# Altium PCB PCB1_test.PcbDoc
Units mm, origin at the board's own origin, x right, y up, seen from the top; angles counter-clockwise.
Board outline 17.02 x 11.05 mm, 2 copper layers (Top Layer, Bottom Layer); 8 components, 8 nets, 55 pads, 9 vias.
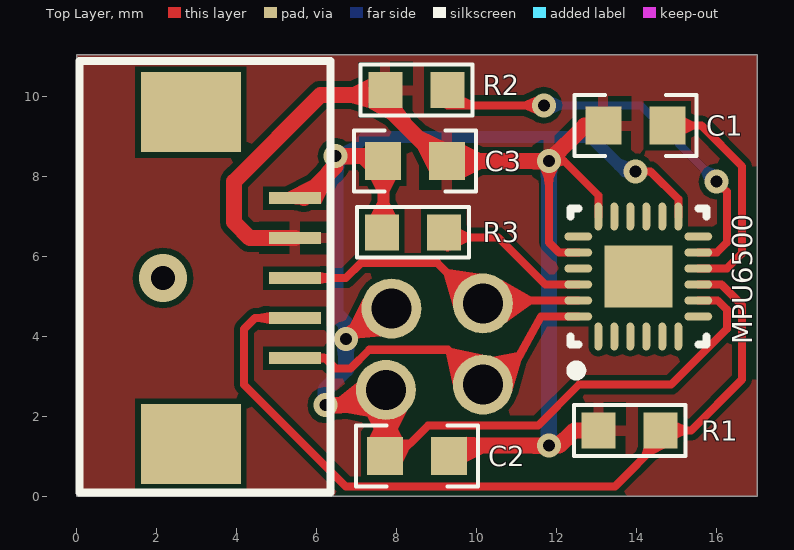
[diagram p0: Top Layer view]
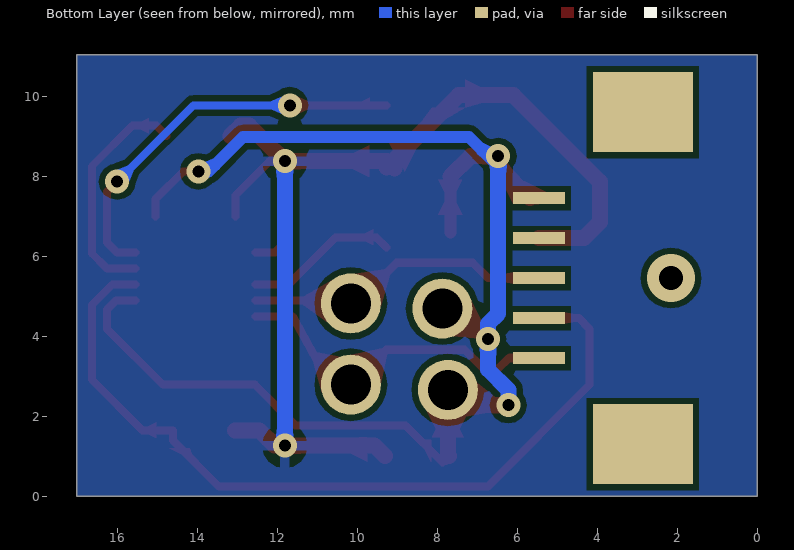
[diagram p1: Bottom Layer view, seen from below]

## Layer stack, top to bottom
Top Solder: solder mask 0.0102, Solder Resist, Dk 3.5
Top Layer: signal copper 0.0356
Dielectric 1: dielectric 0.32, FR-4, Dk 4.8
Bottom Layer: signal copper 0.0356
Bottom Solder: solder mask 0.0102, Solder Resist, Dk 3.5

## Board outline
0,0 0,11.049 17.018,11.049 17.018,0

## Design rules (kind name [scope] priority, off if disabled: settings)
Clearance [All] p1: gap=0.15 ignorepadtopadclearanceinfootprint=TRUE except(0: Arc-Hole Track-Hole SMDPad-Hole THPad-Hole Via-Hole Fill-Hole Poly-Hole Region-Hole Text-Hole)
MinimumSolderMaskSliver [All] p1: minsoldermaskwidth=0.15
PolygonConnect [All] p1: connectstyle=Relief reliefconductorwidth=0.254 reliefentries=4 polygonreliefangle="90 Angle" airgapwidth=0.254
RoutingVias [All] p1: holewidth=0.3 width=0.6 viastyle="Through Hole" minholewidth=0.3 minwidth=0.5 maxholewidth=0.711 maxwidth=1.27
SilkToSolderMaskClearance [IsPad] p1: minsilkscreentomaskgap=0.2 clearancetoexposedcopper=TRUE
SolderMaskExpansion [All] p1: expansion=0.102
Width [All] p1: maxlimit=2.032 minlimit=0.2 preferedwidth=0.2
28 further rules are at their usual default settings.

## Components (designator, comment, footprint, x,y, rotation, side; value= is the part's Value field where it differs from the comment)
* "FPCPin" ? 5.461,7.461 r270 top locked
C1 "C0603" CAPC1608X09N 13.97,9.271 r0 top value=0.1uF
C2 "C0603" CAPC1608X09N 8.509,1.016 r180 top value=10nF
C3 "C0603" CAPC1608X09N 8.459,8.382 r0 top value=0.1uF
MPU6500 "MPU6500" QFN40P300X300X90_HS-25N 14.043,5.5 r90 top locked (schematic designator U1)
R1 "R0603" RESC1608X09N 13.83,1.651 r180 top value=4.7K
R2 "R0603" RESC1608X09N 8.496,10.16 r180 top value=4.7K
R3 "R0603" RESC1608X09N 8.409,6.604 r0 top value=4.7K

## Footprints (in the part's own frame and the unit in brackets; to place one, negate y for a bottom-side part, rotate by r counter-clockwise, add the part's x,y. Pads: shape width x height; smd on the part's side, far side on the other; paste and mask are expansions set on the pad)
CAPC1608X09N [mm] "Chip Capacitor, 2-Leads, Body 1.60x0.80mm, IPC Medium Density"
  rect 0.9x0.95 smd: 1(-0.8,0) 2(0.8,0)
  silkscreen extent -1.52,-0.76 1.52,0.76, body extent -0.85,-0.45 0.85,0.45, height 0.9
QFN40P300X300X90_HS-25N [mm] "QFN, 24-Leads, Body 3.00x3.00mm, Pitch 0.40mm, Thermal Pad 1.54x1.70mm, IPC Medium Density"
  oval 0.7x0.2 smd mask+0: 1(-1.5,1) 2(-1.5,0.6) 3(-1.5,0.2) 4(-1.5,-0.2) 5(-1.5,-0.6) 6(-1.5,-1) 13(1.5,-1) 14(1.5,-0.6) 15(1.5,-0.2) 16(1.5,0.2) 17(1.5,0.6) 18(1.5,1)
  oval 0.2x0.7 smd mask+0: 7(-1,-1.5) 8(-0.6,-1.5) 9(-0.2,-1.5) 10(0.2,-1.5) 11(0.6,-1.5) 12(1,-1.5) 19(1,1.5) 20(0.6,1.5) 21(0.2,1.5) 22(-0.2,1.5) 23(-0.6,1.5) 24(-1,1.5)
  rect 1.54x1.7 smd mask+0: 25(0,0)
  silkscreen extent -2.47,-1.7 1.7,1.7, body extent -1.55,-1.55 1.55,1.55, height 0.9
RESC1608X09N [mm] "Chip Resistor, 2-Leads, Body 1.60x0.80mm, IPC Medium Density"
  rect 0.85x0.9 smd: 1(-0.775,0) 2(0.775,0)
  silkscreen extent -1.4,-0.64 1.4,0.64, body extent -0.85,-0.45 0.85,0.45, height 0.9
? [mm]
  rect 2x2.5 smd: A1(-2.15,-2.6) A1(6.15,-2.6)
  rect 0.3x1.3 smd: AD0(3,0) GND(1,0) SCL(2,0) SDA(4,0) VCC(0,0)
  rect 2x2.5 smd far side: B1(-2.15,-2.6) B1(6.15,-2.6)
  rect 0.3x1.3 smd far side: B1(0,0) B2(1,0) B3(2,0) B4(3,0) B5(4,0)
  silkscreen extent -3.43,-5.39 7.37,0.89

## Part data
MPU6500: library part Component_1

## Free pads (board coordinates)
  round 1.5 hole 1: 1(7.874,4.699) 2(10.16,4.826) 3(7.734,2.667) 4(10.16,2.794)

## Via types
v1: diameter 0.6, hole 0.3, Top Layer to Bottom Layer, 8 vias
v2: diameter 1.2, hole 0.6, Top Layer to Bottom Layer, 1 vias

## Nets (pads, with @x,y where several pads share a name; then routed paths per layer and width w, separated by ;. In a path a pad name is that pad's centre, name@x,y a point inside that pad or via, vN(x,y) a via of type N, cw(c..) or ccw(c..) an arc to the next point about the centre after c; other vN are vias at no path point)
AD0: *.AD0 MPU6500.9 R1.1 | length 20.7
  Top Layer w0.2: R1.1 15.367,1.651 16.637,2.921 16.637,4.787 16.124,5.3 MPU6500.9
  Top Layer w0.203: *.AD0 4.461,4.461 4.191,4.191 4.191,2.794 6.731,0.254 13.462,0.254 14.605,1.397 R1.1
GND: *.GND C1.1 C2.1 C3.2 MPU6500.18 MPU6500.20 R1.2 R2.2 | length 30.4
  Top Layer w0.2: MPU6500.20 12.061,6.1 11.811,6.35 v1(11.811,8.382) 12.192,8.382 13.043,7.531 MPU6500.18
  Top Layer w0.4: *.GND 4.334,6.461 3.937,6.858 3.937,7.874 6.096,10.033 7.467,10.033 C3.2@9.188,8.312 ; C3.2@9.074,8.198 C3.2@9.188,8.312 ; C3.2@9.271,8.229 C3.2@9.188,8.312 ; C2.1 9.563,1.27 v1(11.811,1.27) 12.065,1.27 12.446,1.651 R1.2 ; C1.1@13.17,9.017 12.916,9.271 12.7,9.271 v1(11.811,8.382) C3.2 C3.2@9.188,8.312
  Bottom Layer w0.4: v1(11.811,1.27) v1(11.811,8.382)
NetC1_2: C1.2 MPU6500.10 | length 5.8
  Top Layer w0.2: C1.2@14.77,9.017 15.024,9.271 15.621,9.271 16.637,8.255 16.637,6.081 16.256,5.7 MPU6500.10
NetR2_1: MPU6500.11 R2.1 | length 10
  Top Layer w0.2: R2.1@9.271,9.779 v1(11.684,9.779) ; MPU6500.11 16.006,6.1 16.256,6.35 16.256,7.62 v1(16.002,7.874)
  Bottom Layer w0.2: v1(11.684,9.779) 14.097,9.779 v1(16.002,7.874)
NetR3_2: MPU6500.22 R3.2 | length 3.9
  Top Layer w0.2: R3.2@9.271,6.223 9.525,6.477 10.541,6.477 11.718,5.3 MPU6500.22
SCL: *.SCL MPU6500.23 pad.2 | length 8.4
  Top Layer w0.203: *.SCL 6.731,5.461 7.112,5.842 9.017,5.842 9.779,5.08 pad.2@9.779,4.9 ; pad.2@9.525,4.9 pad.2@9.779,4.9 ; pad.2@9.779,4.445 pad.2@9.779,4.9 ; MPU6500.23 pad.2@9.779,4.9
SDA: *.SDA MPU6500.24 pad.4 | length 8.7
  Top Layer w0.203: *.SDA 6.211,3.461 6.474,3.198 6.848,3.198 7.319,3.669 9.285,3.669 pad.4 10.767,2.969 11.615,4.5 MPU6500.24
VCC3.3: *.VCC C2.2 C3.1 MPU6500.8 MPU6500.13 pad.1 pad.3 R3.1 | length 37.1
  Top Layer w0.2: C2.2 7.87,0.855 8.792,1.778 11.541,1.778 12.557,2.794 14.859,2.794 16.256,4.191 16.256,4.673 16.029,4.9 MPU6500.8 ; v1(13.97,8.128) 14.351,8.128 15.043,7.436 MPU6500.13
  Top Layer w0.3: *.VCC *.VCC@5.683,7.461 ; v1@6.744,3.937 v1(6.731,3.937) 7.493,4.699 pad.1 ; R3.1@7.671,6.604 C3.1@7.671,8.001
  Top Layer w0.4: *.VCC@5.683,7.461 6.477,8.255 v1(6.477,8.509) 7.163,8.509 C3.1@7.671,8.001 ; v1(6.223,2.286) 7.353,2.286 pad.3 ; C2.2 7.734,1.041 pad.3 ; pad.3@7.734,2.794 pad.3
  Bottom Layer w0.3: v1(6.477,8.509) 6.604,8.382 7.204,8.982 12.862,8.982 13.716,8.128 v1(13.97,8.128)
  Bottom Layer w0.4: v1(6.223,2.286) 6.223,2.667 6.731,3.175 v1(6.731,3.937) 6.731,4.318 6.477,4.572 v1(6.477,8.509)
pads on no net: *.A1 *.B1 *.B2 *.B3 *.B4 *.B5 MPU6500.1 MPU6500.2 MPU6500.3 MPU6500.4 MPU6500.5 MPU6500.6 MPU6500.7 MPU6500.12 MPU6500.14 MPU6500.15 MPU6500.16 MPU6500.17 MPU6500.19 MPU6500.21 MPU6500.25
copper on no net:
  other v2: 2.159,5.461

## Polygon pours and split planes (outlines as drawn)
GND on Top Layer (solid, pour order 20): 0,11.049 17.018,11.049 17.018,0 0,0
no net on Top Layer "Top Layer-No Net" (solid, pour order 4): 0,11.049
GND on Bottom Layer (solid, pour order 22): 0,11.049 17.018,11.049 17.018,0 0,0
no net on Bottom Layer "Bottom Layer-No Net" (solid, pour order 6): 0,11.049

## Silkscreen, mask and mechanical layers (free items; w line width, h text height)
Mechanical 1:
  the board outline again, w0.2
Drill Drawing:
  lines w0.2: -0.381,39.066 -0.381,28.067 15.24,28.067 15.24,39.114 -0.381,39.067 ; 0,10.999 0,0 15.621,0 15.621,11.047 0,11 ; 17.145,39.066 17.145,28.067 32.766,28.067 32.766,39.114 17.145,39.067 ; 17.526,10.999 17.526,0 33.147,0 33.147,11.047 17.526,11